# Altium PCB Roverto_shield_PCB.PcbDoc
Units mm, origin at the board's own origin, x right, y up, seen from the top; angles counter-clockwise.
Board outline 50 x 50 mm, 4 copper layers (Top Layer, Internal Plane 1, Internal Plane 2, Bottom Layer); 23 components, 22 nets, 94 pads, 3 vias.
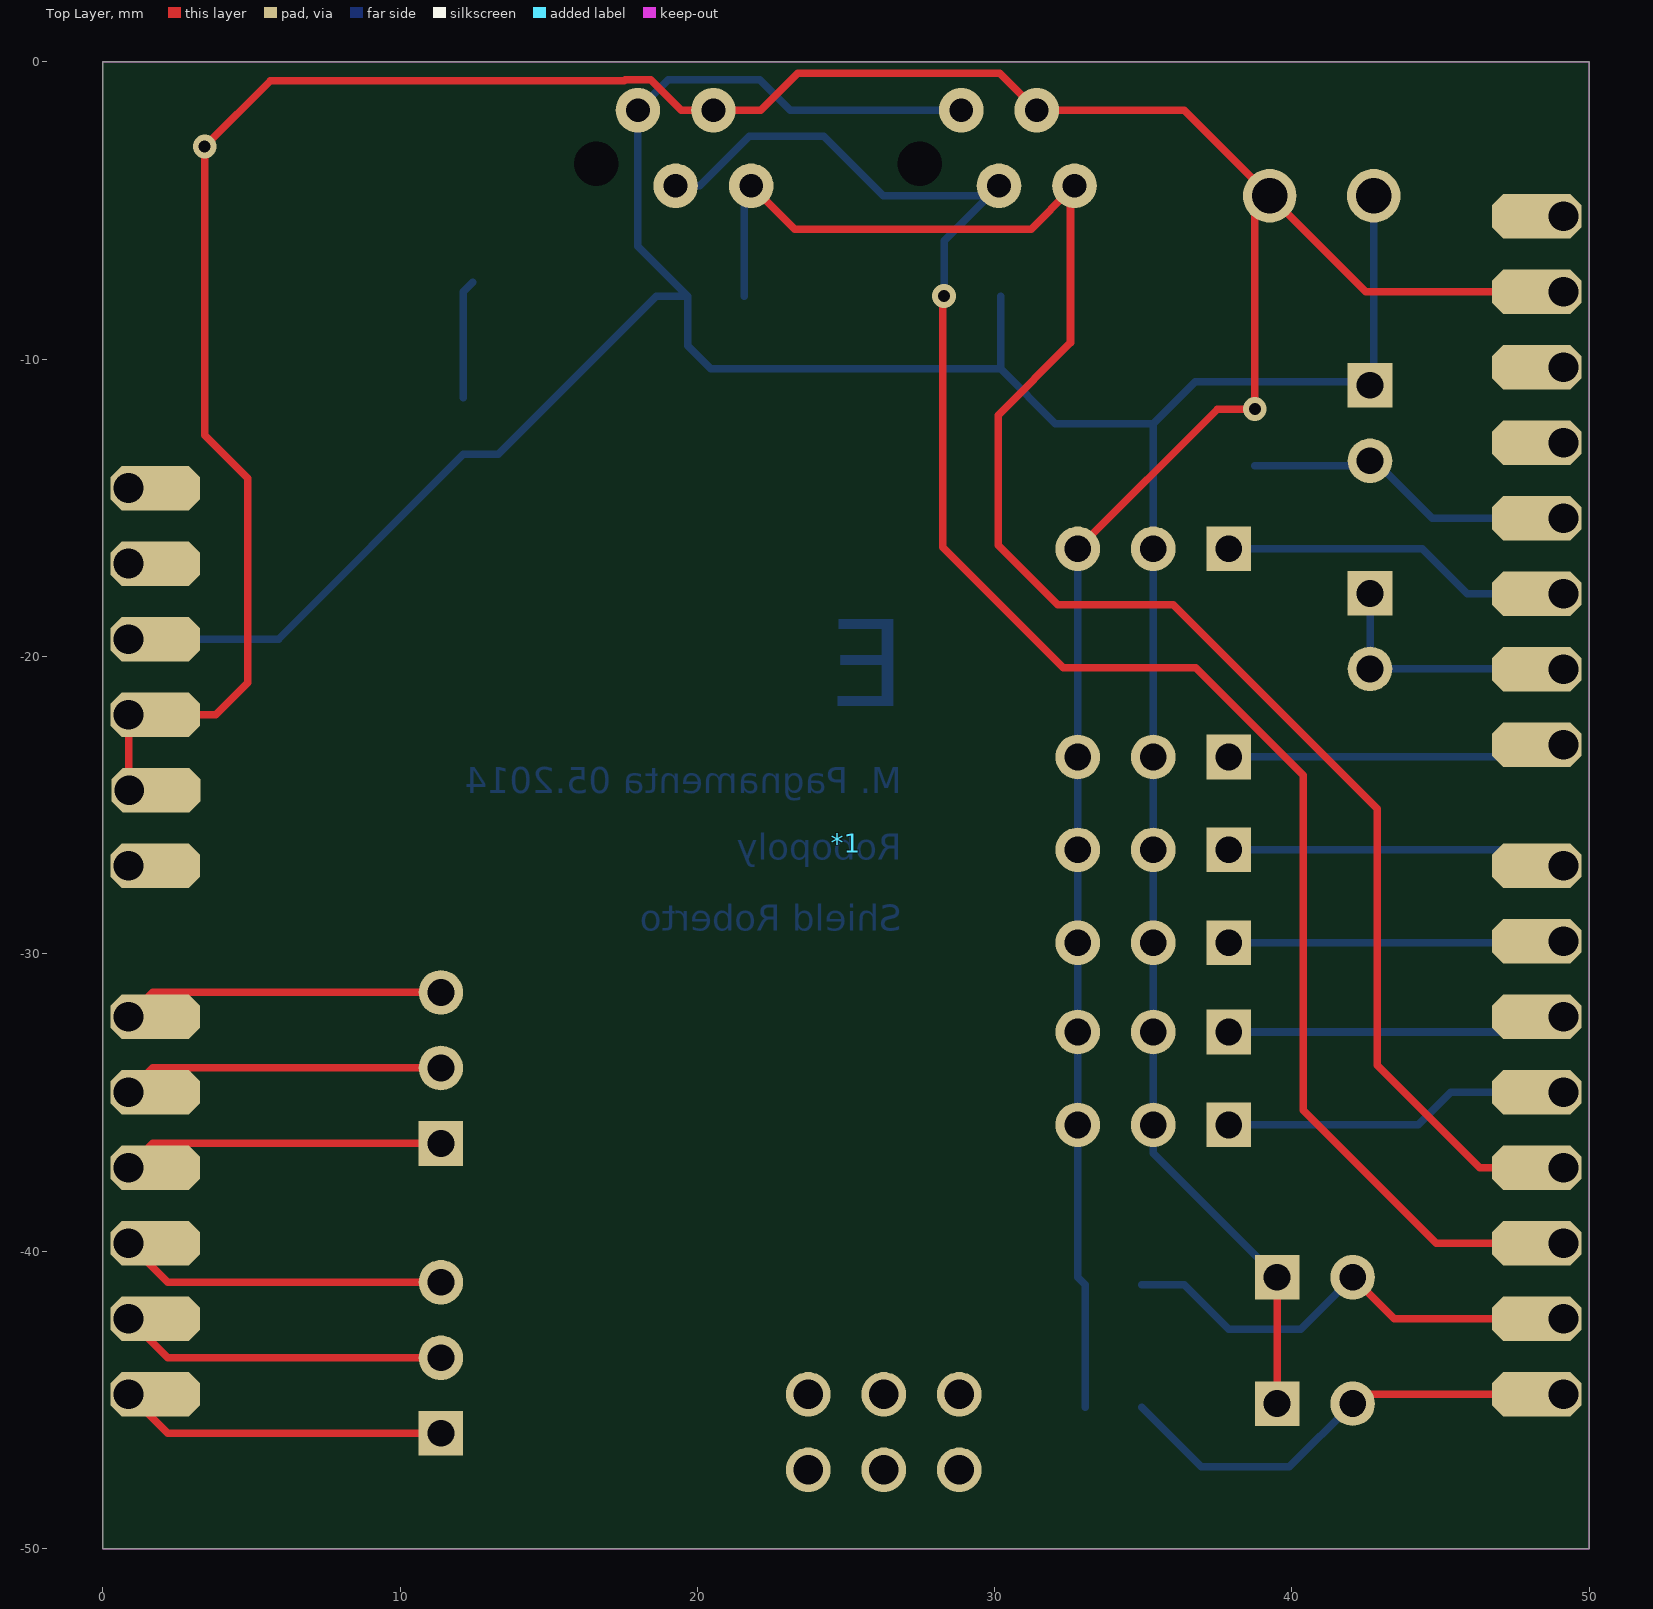
[diagram p0: Top Layer view]
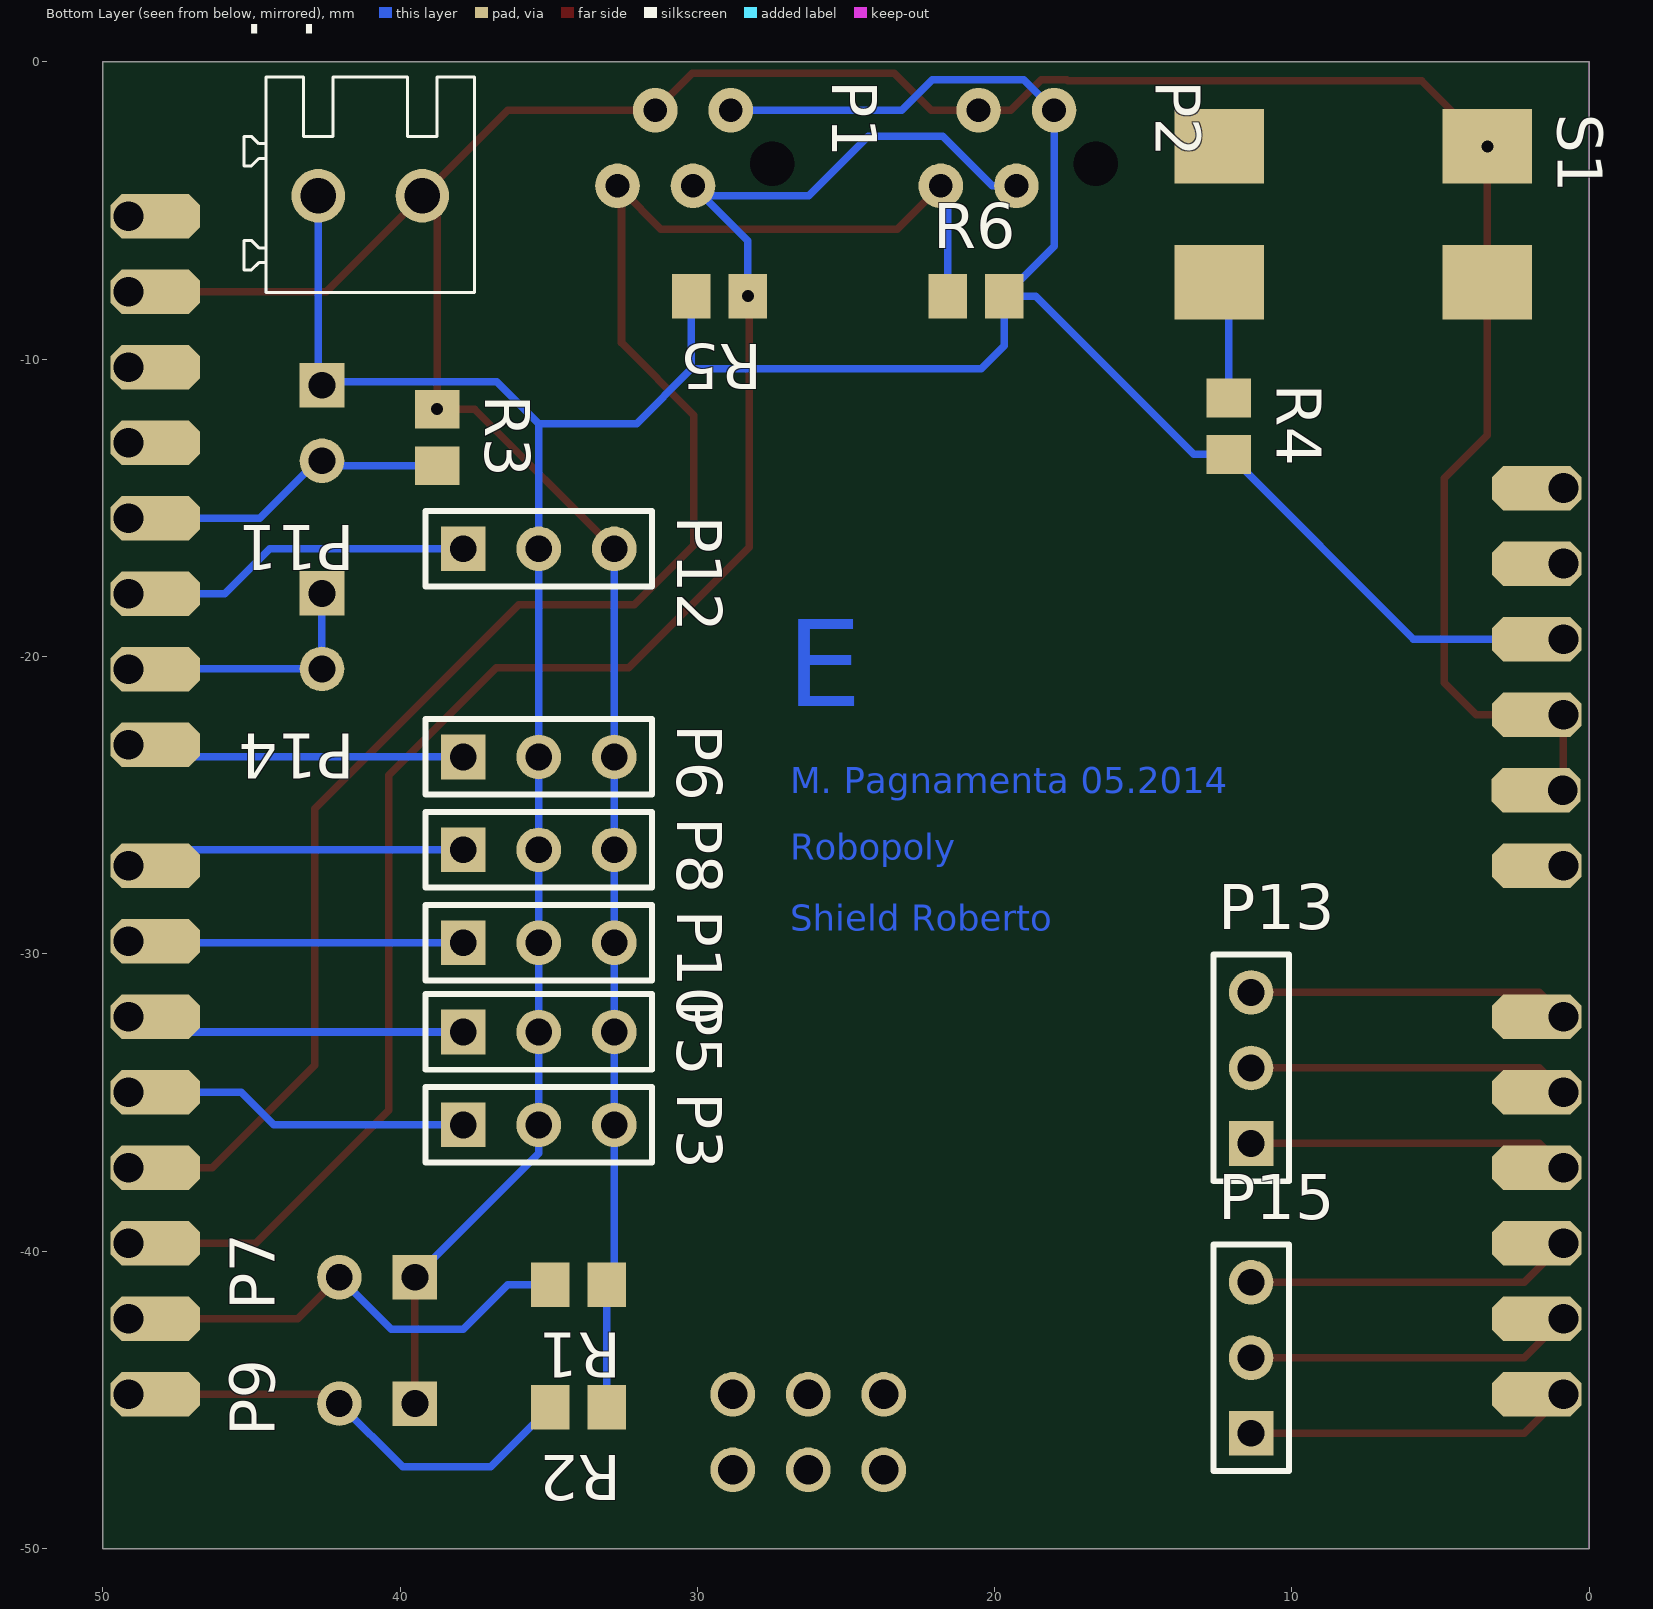
[diagram p1: Bottom Layer view, seen from below]
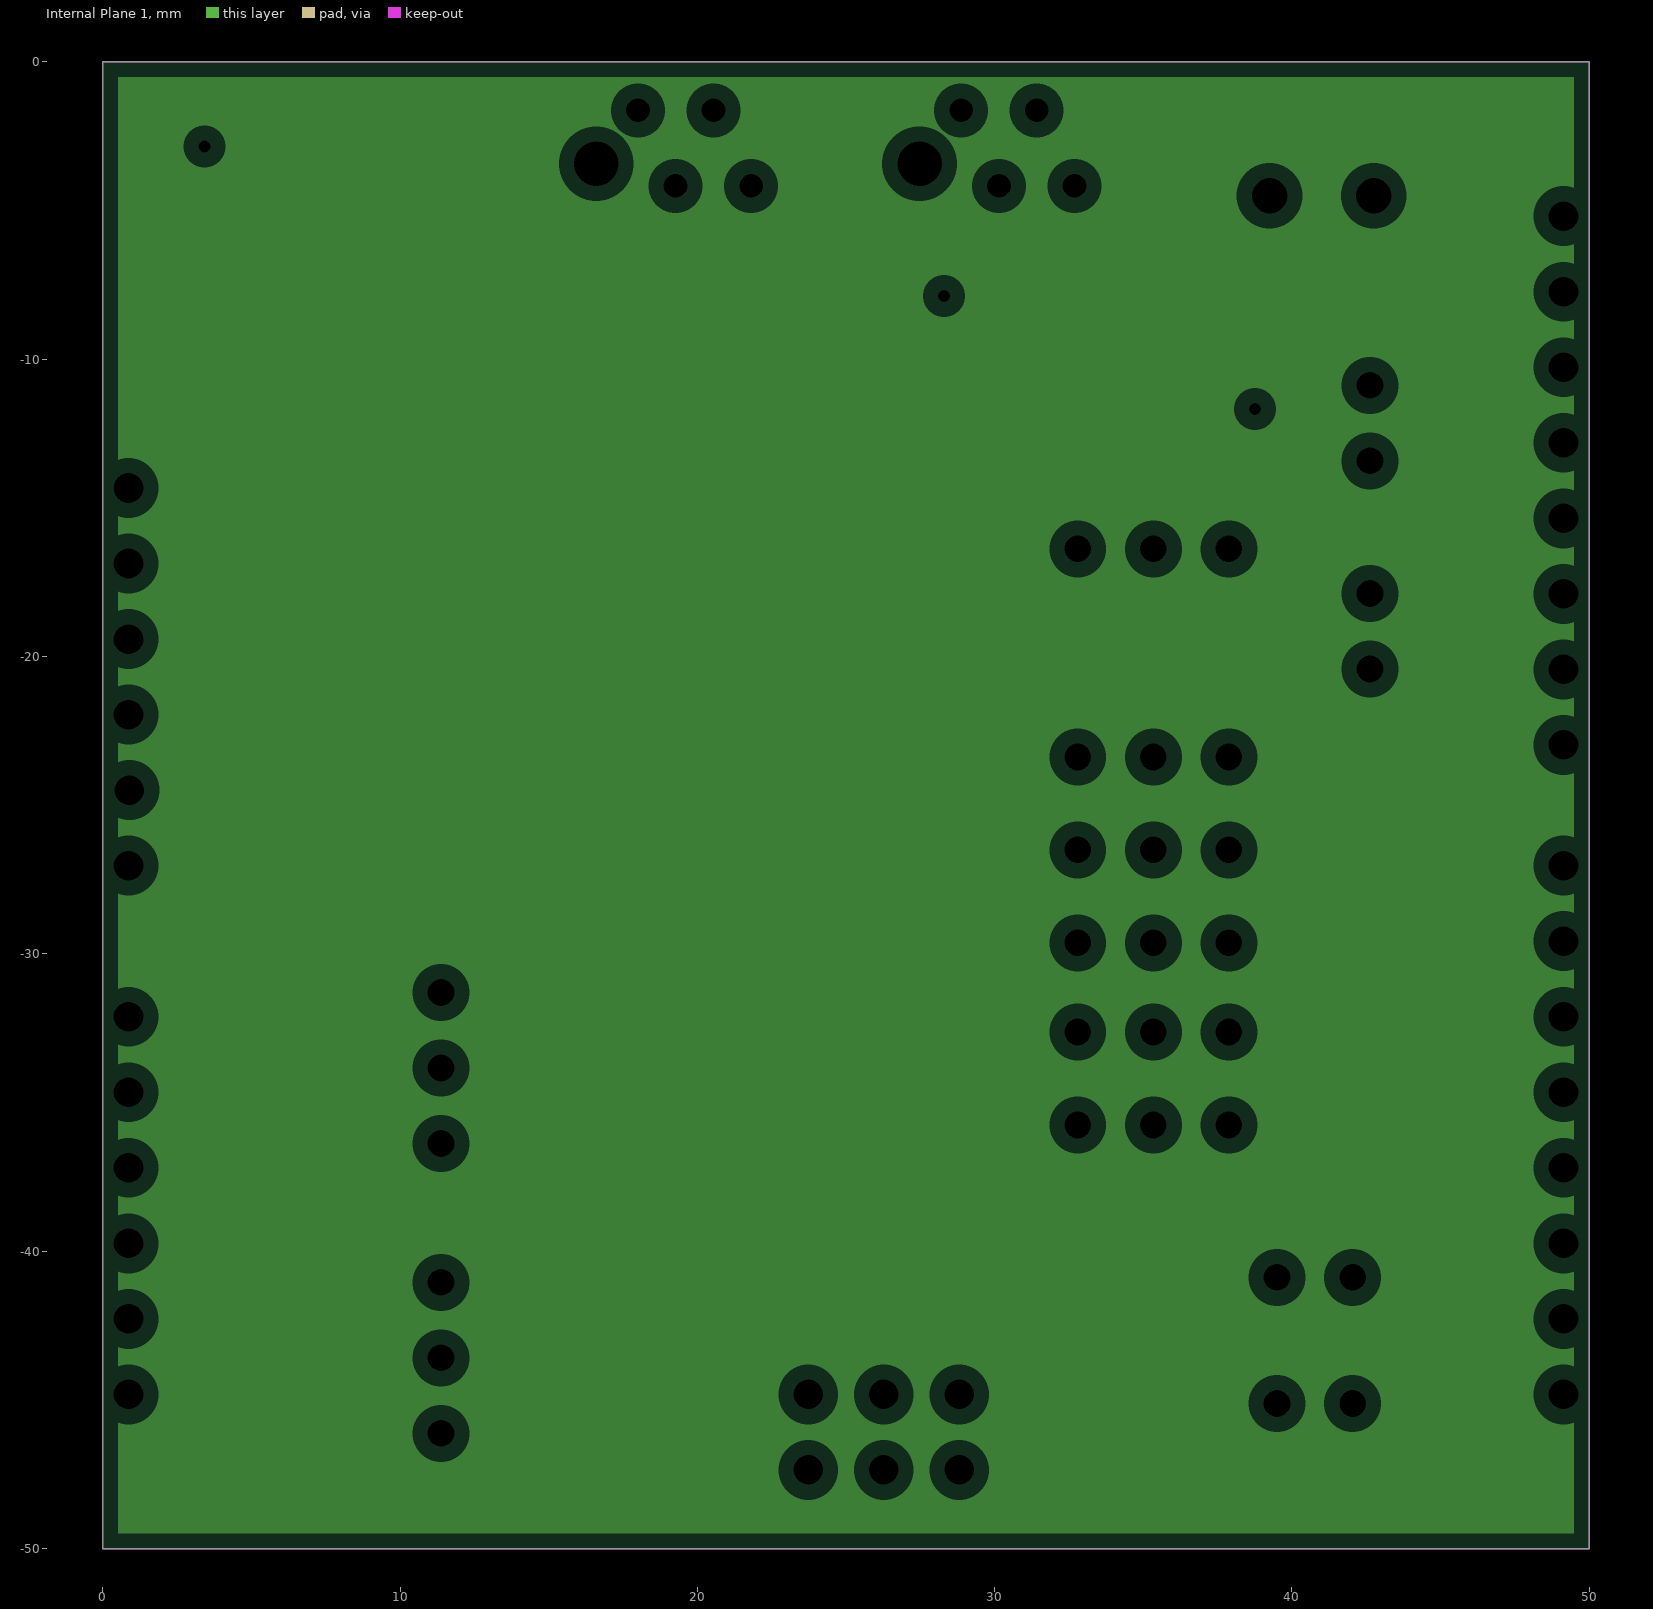
[diagram p2: Internal Plane 1, clearances drawn from the general rule]
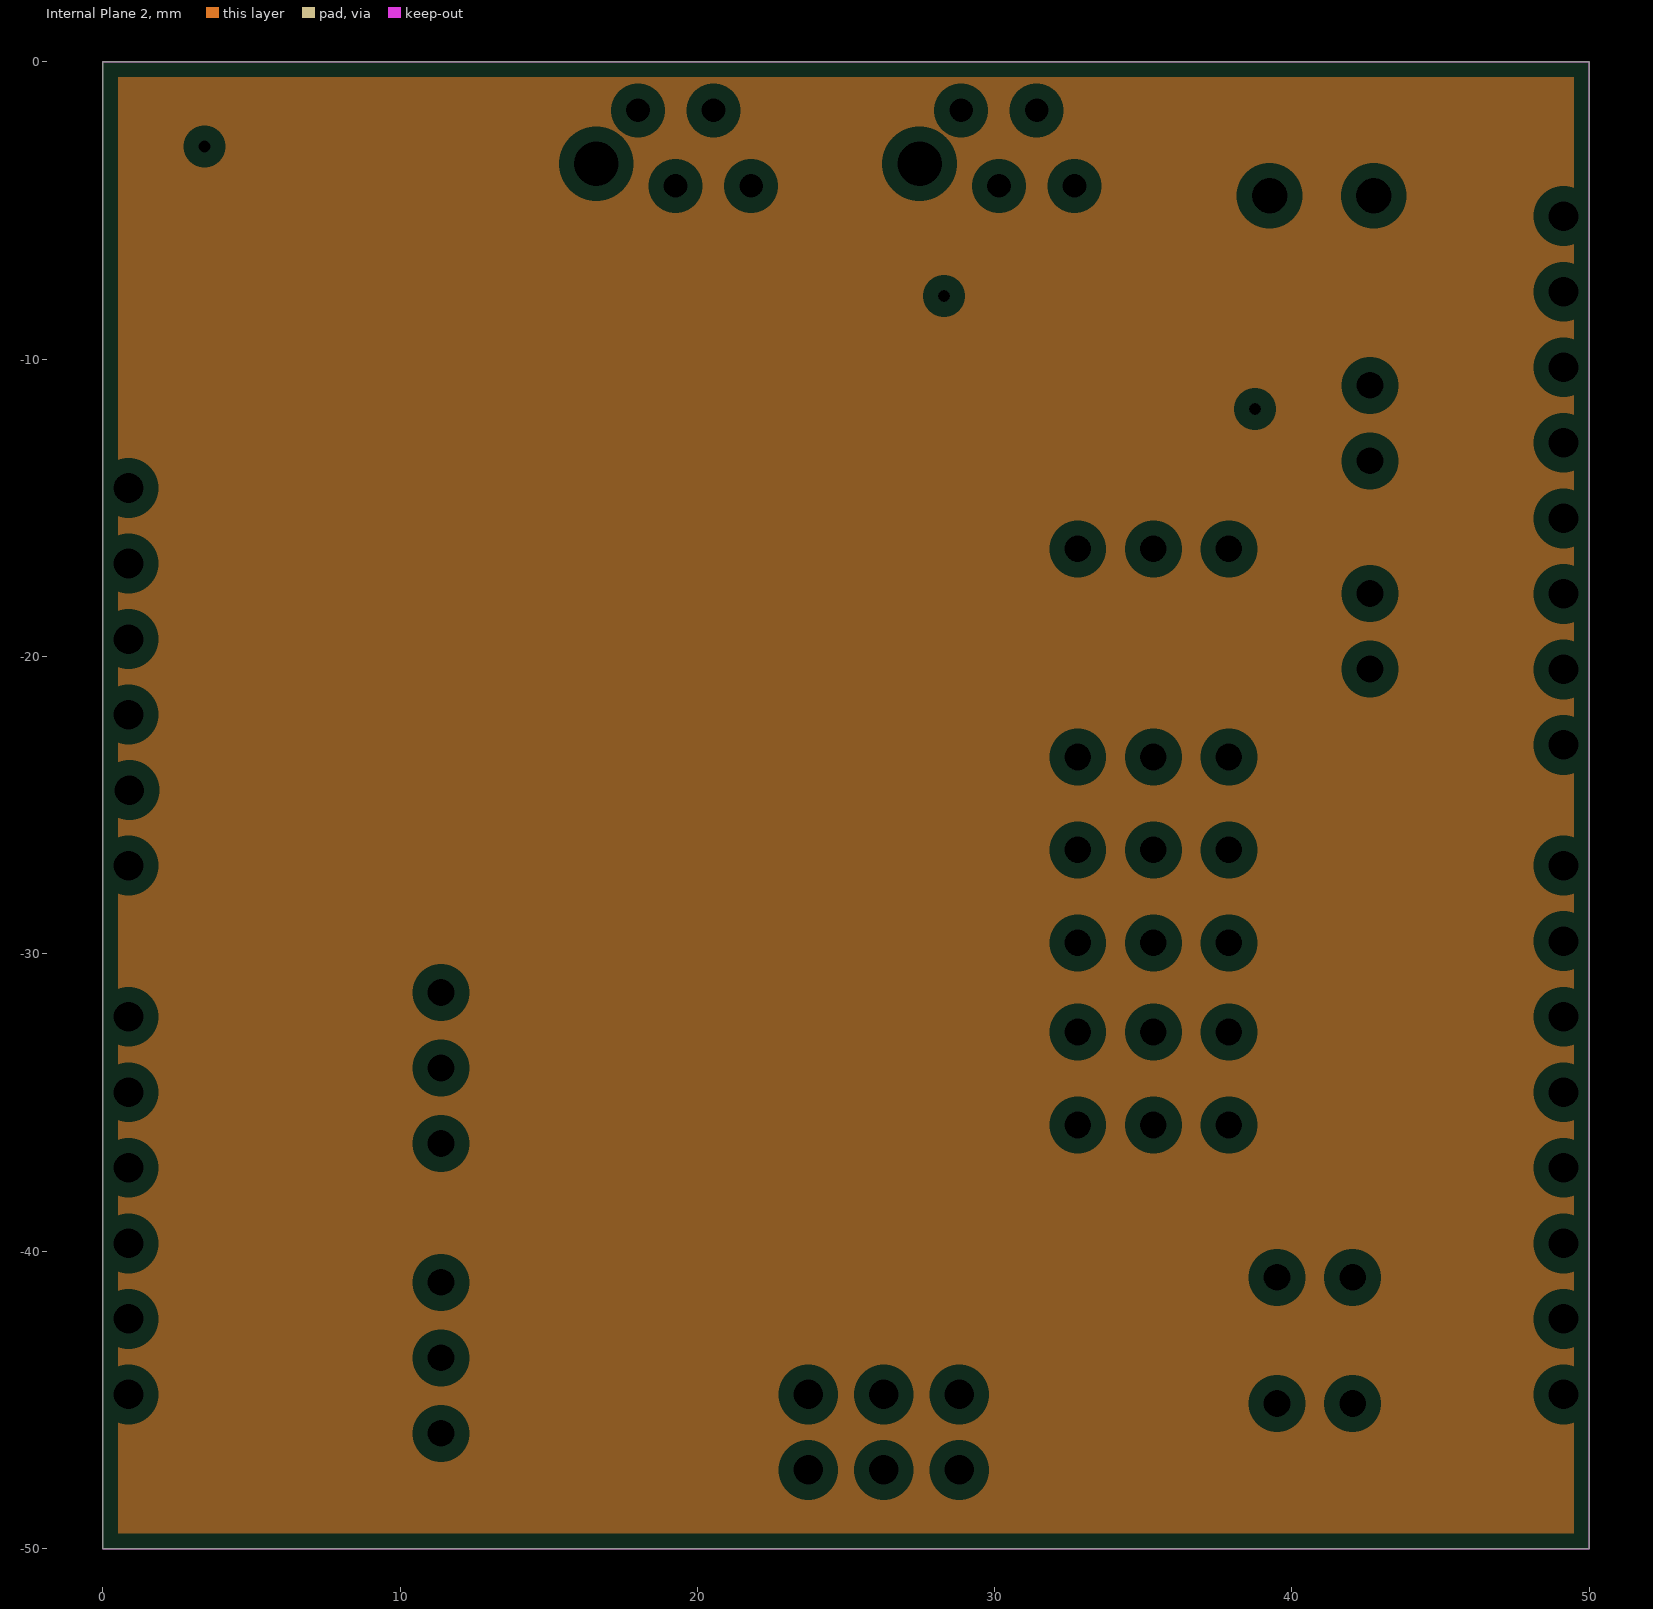
[diagram p3: Internal Plane 2, clearances drawn from the general rule]
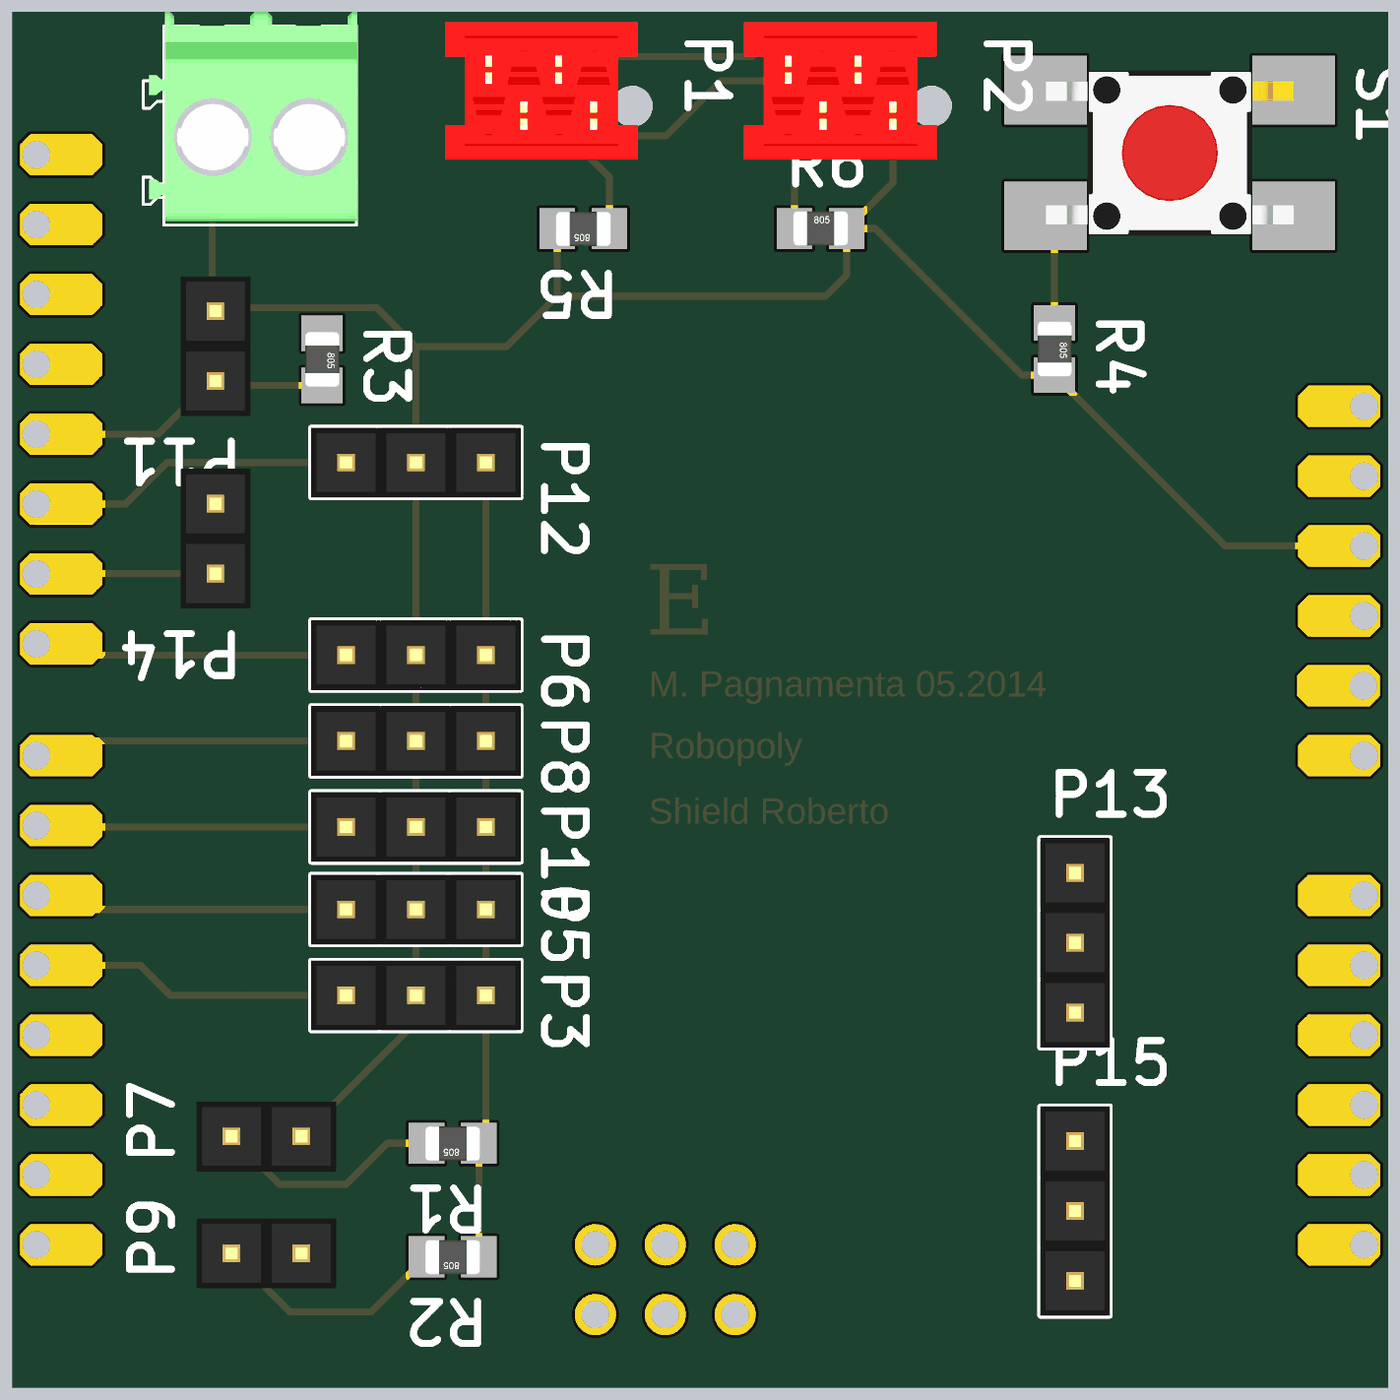
[diagram p4: 3D render of the assembled board from below, using the file's embedded part models]

## Layer stack, top to bottom
Top Layer: signal copper 0.0356
Dielectric: dielectric 0.32, FR-4, Dk 4.8
Internal Plane 1: plane copper 0.0356
Dielectric: dielectric 0.32, FR-4, Dk 4.8
Internal Plane 2: plane copper 0.0356
Dielectric: dielectric 0.32, FR-4, Dk 4.8
Bottom Layer: signal copper 0.0356

## Board outline
0,-50 50,-50 50,0 0,0

## Design rules (kind name [scope] priority, off if disabled: settings)
Clearance [All] p1: gap=0.15
PlaneClearance [All] p1: clearance=0.508
PlaneConnect [All] p1: planeconnectstyle=Direct reliefexpansion=0.508 reliefentries=4 reliefconductorwidth=0.254 reliefairgap=0.254
PolygonConnect PolygonConnect_nettie [InComponent('nt1') vs InNet('GND')] p1: connectstyle=Direct reliefconductorwidth=0.254 reliefentries=4 polygonreliefangle="90 Angle"
PolygonConnect PolygonConnect_pad [InComponent('U3') vs InNet('GND')] p2: connectstyle=Direct reliefconductorwidth=0.254 reliefentries=4 polygonreliefangle="90 Angle"
PolygonConnect [All] p3: connectstyle=Relief reliefconductorwidth=0.254 reliefentries=4 polygonreliefangle="90 Angle"
RoutingVias [All] p1: holewidth=0.35 width=0.6 viastyle="Through Hole" minholewidth=0.2 minwidth=0.4 maxholewidth=1.2 maxwidth=1
SilkscreenOverComponentPads [All] p1: minsilkscreentomaskgap=0.254
SolderMaskExpansion SolderMaskExpansion_via [IsVia] p1: expansion=-0.5
SolderMaskExpansion [All] p2: expansion=0.102
Width [All] p1: maxlimit=1 minlimit=0.203 preferedwidth=0.203
25 further rules are at their usual default settings.

## Components (designator, comment, footprint, x,y, rotation, side; value= is the part's Value field where it differs from the comment)
*1 "Leonardo pins with ISP" "Leonardo pins with ISP" 25,-25 r0 top locked
P1 "I2C" TYCO/215079-4 28.875,-1.625 r180 bottom
P2 "I2C" TYCO/215079-4 18,-1.625 r180 bottom
P3 "Header 3" HEADER1x3 37.875,-35.75 r180 bottom
P4 "Terminal Block" "Phoenix PT 2-Pole" 42.75,-4.5 r180 bottom
P5 "Header 3" HEADER1x3 37.875,-32.625 r180 bottom
P6 "Header 3" HEADER1x3 37.875,-23.375 r180 bottom
P7 "Header 2" HEADER1x2 39.5,-40.875 r0 bottom
P8 "Header 3" HEADER1x3 37.875,-26.5 r180 bottom
P9 "Header 2" HEADER1x2 39.5,-45.125 r0 bottom
P10 "Header 3" HEADER1x3 37.875,-29.625 r180 bottom
P11 "Header 2" HEADER1x2 42.625,-10.875 r270 bottom
P12 "Header 3" HEADER1x3 37.875,-16.375 r180 bottom
P13 "Header 3" HEADER1x3 11.375,-36.375 r90 bottom
P14 "Header 2" HEADER1x2 42.625,-17.875 r270 bottom
P15 "Header 3" HEADER1x3 11.375,-46.125 r90 bottom
R1 "10kOhm" R/0805 34,-41.125 r0 bottom
R2 "10kOhm" R/0805 34,-45.25 r0 bottom
R3 "10kOhm" R/0805 38.75,-12.625 r270 bottom
R4 "10kOhm" R/0805 12.125,-12.25 r270 bottom
R5 "10kOhm" R/0805 29.25,-7.875 r0 bottom
R6 "10kOhm" R/0805 20.625,-7.875 r180 bottom
S1 "SMD Switch" SMD_SW_Red 7.875,-5.125 r180 bottom

## Footprints (in the part's own frame and the unit in brackets; to place one, negate y for a bottom-side part, rotate by r counter-clockwise, add the part's x,y. Pads: shape width x height; smd on the part's side, far side on the other; paste and mask are expansions set on the pad)
HEADER1x2 [mm] "2.54mm Header"
  rect 1.5x1.5 hole 0.9: 1(0,0)
  round 1.5 hole 0.9: 2(2.54,0)
  body extent -1.27,-1.27 3.81,1.27, height 8.44
HEADER1x3 [mm] "Connector; Header; 3 Position"
  rect 1.5x1.5 hole 0.9: 1(0,0)
  round 1.5 hole 0.9: 2(2.54,0) 3(5.08,0)
  silkscreen extent -1.27,-1.27 6.35,1.27, body extent -1.27,-1.27 6.35,1.27, height 8.43
"Leonardo pins with ISP" [mm]
  oct 3x1.5 hole 1 copper offset 0.9,0: 1(-24.13,10.668) 2(-24.13,8.128) 3(-24.13,5.588) 4(-24.13,3.048) 5(-24.105,0.508) 6(-24.13,-2.032) A0(-24.13,-7.112) A1(-24.13,-9.652) A2(-24.13,-12.192) A3(-24.13,-14.732) A4(-24.13,-17.272) A5(-24.13,-19.812)
  oct 3x1.5 hole 1 copper offset -0.9,0: 27(24.13,17.272) 28(24.13,19.812) D0(24.13,-19.812) D1(24.13,-17.272) D2(24.13,-14.732) D3(24.13,-12.192) D4(24.13,-9.652) D5(24.13,-7.112) D6(24.13,-4.572) D7(24.13,-2.032) D8(24.13,2.032) D9(24.13,4.572) D10(24.13,7.112) D11(24.13,9.652) D12(24.13,12.192) D13(24.13,14.732)
  round 1.5 hole 1: GND(-1.27,-22.352) MISO(3.81,-19.812) MOSI(1.27,-22.352) RESET(-1.27,-19.812) SCK(1.27,-19.812) VCC(3.81,-22.352)
  Keep-Out Layer lines w0.025: -25,-25 25,-25 25,25 -25,25 -25,-25
"Phoenix PT 2-Pole" [mm] "PT 1,5/ 2-3,5-H - Ref 1984617"
  round 1.8 hole 1.2: 1(0,0) 2(3.5,0)
  silkscreen extent -2.5,-3.25 5.25,4, body extent -2.29,-3.1 5.28,4.5, height 9
R/0805 [mm] "Chip Resistor; Body 2.0 x 1.3 mm (LxW typ)"
  rect 1.3x1.5 smd: 1(-0.95,0) 2(0.95,0)
  body extent -1,-0.62 1,0.64, height 0.78
SMD_SW_Red [mm]
  rect 3x2.5 smd: 0(-4.572,2.286) 1(-4.572,-2.286) 2(4.445,2.286) 3(4.445,-2.286)
  body extent -4.55,-3 4.45,3, height 5
TYCO/215079-4 [mm]
  round 1.5 hole 0.8: 1(0,0) 2(-1.27,-2.54) 3(-2.54,0) 4(-3.81,-2.54)
  round 1.3 hole 1.5 unplated: 5(1.4,-1.8)
  body extent -5.41,-3.74 1.6,1.26, height 4

## Part data
P1 P2: library part Micromatch-I2C, "Micromatch I2C Connector"
P3 P5 P6 P8 P10 P12 P13 P15: "Header, 3-Pin"
P4: library part "Screw Block 2", "2-Pin Screw Terminal"
P7 P9 P11 P14: "Header, 2-Pin"
R1 R2 R3 R4 R5 R6: library part R, "Resistor"
S1: "Switch"

## Via types
v1: diameter 0.8, hole 0.4, Top Layer to Bottom Layer, 3 vias

## Nets (pads, with @x,y where several pads share a name; then routed paths per layer and width w, separated by ;. In a path a pad name is that pad's centre, name@x,y a point inside that pad or via, vN(x,y) a via of type N, cw(c..) or ccw(c..) an arc to the next point about the centre after c; other vN are vias at no path point)
BUTTON_LEFT_HAND: *1.D0 P9.2 R2.2 | length 16
  Top Layer w0.254: P9.2 42.353,-44.812 *1.D0
  Bottom Layer w0.254: R2.2 36.95,-47.25 39.915,-47.25 P9.2
BUTTON_RIGHT_HAND: *1.D1 P7.2 R1.2 | length 16.1
  Top Layer w0.254: P7.2 43.437,-42.272 *1.D1
  Bottom Layer w0.254: R1.2 36.375,-41.125 37.875,-42.625 40.29,-42.625 P7.2
GND: *1.4 *1.5 *1.27 P1.3 P2.3 P3.3 P4.2 P5.3 P6.3 P8.3 P10.3 P12.3 R1.1 R2.1 R3.1 S1.2 | length 120.5
  Top Layer w0.254: *1.5 0.87,-24.467 *1.4 3.798,-21.952 4.875,-20.875 4.875,-14 3.43,-12.555 v1(3.43,-2.839) 5.644,-0.625 17.548,-0.625 17.575,-0.598 18.425,-0.598 19.452,-1.625 P2.3 22.125,-1.625 23.375,-0.375 30.165,-0.375 P1.3 36.375,-1.625 P4.2 ; P12.3 37.495,-11.675 v1(38.75,-11.675) 38.75,-5 P4.2 ; *1.27 42.478,-7.728 P4.2
  Bottom Layer w0.254: P12.3 P6.3 P8.3 P10.3 P5.3 P3.3 32.795,-40.87 R1.1 R2.1
LED_L_B: *1.A2 P13.1 | length 10.8
  Top Layer w0.254: *1.A2 1.687,-36.375 P13.1
LED_L_G: *1.A1 P13.2 | length 10.8
  Top Layer w0.254: *1.A1 1.687,-33.835 P13.2
LED_L_R: *1.A0 P13.3 | length 10.8
  Top Layer w0.254: *1.A0 1.687,-31.295 P13.3
LED_R_B: *1.A5 P15.1 | length 11
  Top Layer w0.254: *1.A5 2.183,-46.125 P15.1
LED_R_G: *1.A4 P15.2 | length 11
  Top Layer w0.254: *1.A4 2.183,-43.585 P15.2
LED_R_R: *1.A3 P15.3 | length 11
  Top Layer w0.254: *1.A3 2.183,-41.045 P15.3
PAY_BUTTON: *1.D10 P12.1 | length 11.9
  Bottom Layer w0.254: P12.1 44.375,-16.375 45.888,-17.888 *1.D10
POMPE: *1.D9 P14.1 P14.2 | length 9.1
  Bottom Layer w0.254: P14.1 P14.2 49.117,-20.415 *1.D9
RESET: *1.1
RST: R4.1 S1.1 | length 4
  Bottom Layer w0.254: R4.1 12.125,-7.733 S1.1
SCL: *1.D3 P1.4 P2.4 R6.1 | length 61.6
  Top Layer w0.254: P2.4 23.27,-5.625 31.225,-5.625 P1.4@32.55,-4.3 ; P1.4 P1.4@32.55,-4.3 ; *1.D3 46.317,-37.192 42.875,-33.75 42.875,-25.125 36,-18.25 32.125,-18.25 30.125,-16.25 30.125,-11.875 32.55,-9.45 P1.4@32.55,-4.3
  Bottom Layer w0.254: R6.1 21.575,-4.4 P2.4
SDA: *1.D2 P1.2 P2.2 R5.1 | length 62.2
  Top Layer w0.254: v1@28.25,-7.875 28.25,-16.321 32.304,-20.375 36.767,-20.375 40.375,-23.983 40.375,-35.25 44.857,-39.732 *1.D2
  Bottom Layer w0.254: P2.2 20.085,-4.165 21.75,-2.5 24.25,-2.5 26.25,-4.5 P1.2@29.81,-4.5 ; v1(28.3,-7.875) 28.3,-6.01 P1.2@29.81,-4.5 ; P1.2 P1.2@29.81,-4.5
SERVO_ARM_L: *1.D7 P8.1 | length 11.5
  Bottom Layer w0.254: P8.1 48.598,-26.5 *1.D7
SERVO_ARM_R: *1.D8 P6.1 | length 11.4
  Bottom Layer w0.254: P6.1 48.723,-23.375 *1.D8
SERVO_L: *1.D4 P3.1 | length 11.7
  Bottom Layer w0.254: P3.1 44.25,-35.75 45.348,-34.652 *1.D4
SERVO_PAPILLON: *1.D6 P10.1 | length 11.3
  Bottom Layer w0.254: P10.1 49.077,-29.625 *1.D6
SERVO_R: *1.D5 P5.1 | length 11.5
  Bottom Layer w0.254: P5.1 48.617,-32.625 *1.D5
VCC: *1.3 P1.1 P2.1 P3.2 P4.1 P5.2 P6.2 P7.1 P8.2 P9.1 P10.2 P11.1 P12.2 R4.2 R5.2 R6.2 | length 112.2
  Top Layer w0.254: P9.1 P7.1
  Bottom Layer w0.254: *1.3 5.913,-19.412 R4.2 13.3,-13.2 18.625,-7.875 R6.2 ; P1.1 23.125,-1.625 22.098,-0.598 19.027,-0.598 P2.1 18,-6.2 R6.2 ; R5.2 30.2,-10.325 ; P7.1 35.335,-36.71 P3.2 P5.2 P10.2 P8.2 P6.2 P12.2 35.335,-12.165 ; P4.1 42.75,-10.75 P11.1 42.498,-10.748 36.752,-10.748 35.335,-12.165 ; R6.2 19.675,-9.55 20.45,-10.325 30.2,-10.325 ; 30.2,-10.325 32.04,-12.165 35.335,-12.165
WATER_SENSOR: *1.D11 P11.2 R3.2 | length 11.2
  Bottom Layer w0.254: R3.2 42.465,-13.575 P11.2 42.79,-13.415 44.723,-15.348 *1.D11
pads on no net: *1.2 *1.6 *1.28 *1.D12 *1.D13 *1.GND *1.MISO *1.MOSI *1.RESET *1.SCK *1.VCC P1.5 P2.5 S1.0 S1.3

## Polygon pours and split planes (outlines as drawn)
no net on Internal Plane 1 (split plane): 49.49,-49.49 0.51,-49.49 0.51,-0.51 49.49,-0.51
no net on Internal Plane 2 (split plane): 49.49,-49.49 0.51,-49.49 0.51,-0.51 49.49,-0.51

## Other copper
Bottom Layer:
  text "E" at 27,-22.625 h5
  text "M. Pagnamenta 05.2014" at 26.875,-24.875 h1.5
  text "Robopoly" at 26.875,-27.125 h1.5
  text "Shield Roberto" at 26.875,-29.5 h1.5

## Silkscreen, mask and mechanical layers (free items; w line width, h text height)
Mechanical 1:
  the board outline again, w0.254